# Altium PCB BMS2.PcbDoc
Units mm, origin at the board's own origin, x right, y up, seen from the top; angles counter-clockwise.
Board outline 110.8 x 102.8 mm, 2 copper layers (Top Layer, Bottom Layer); 70 components, 54 nets, 280 pads, 54 vias.
Unrouted connection lines stored in the file: 1.
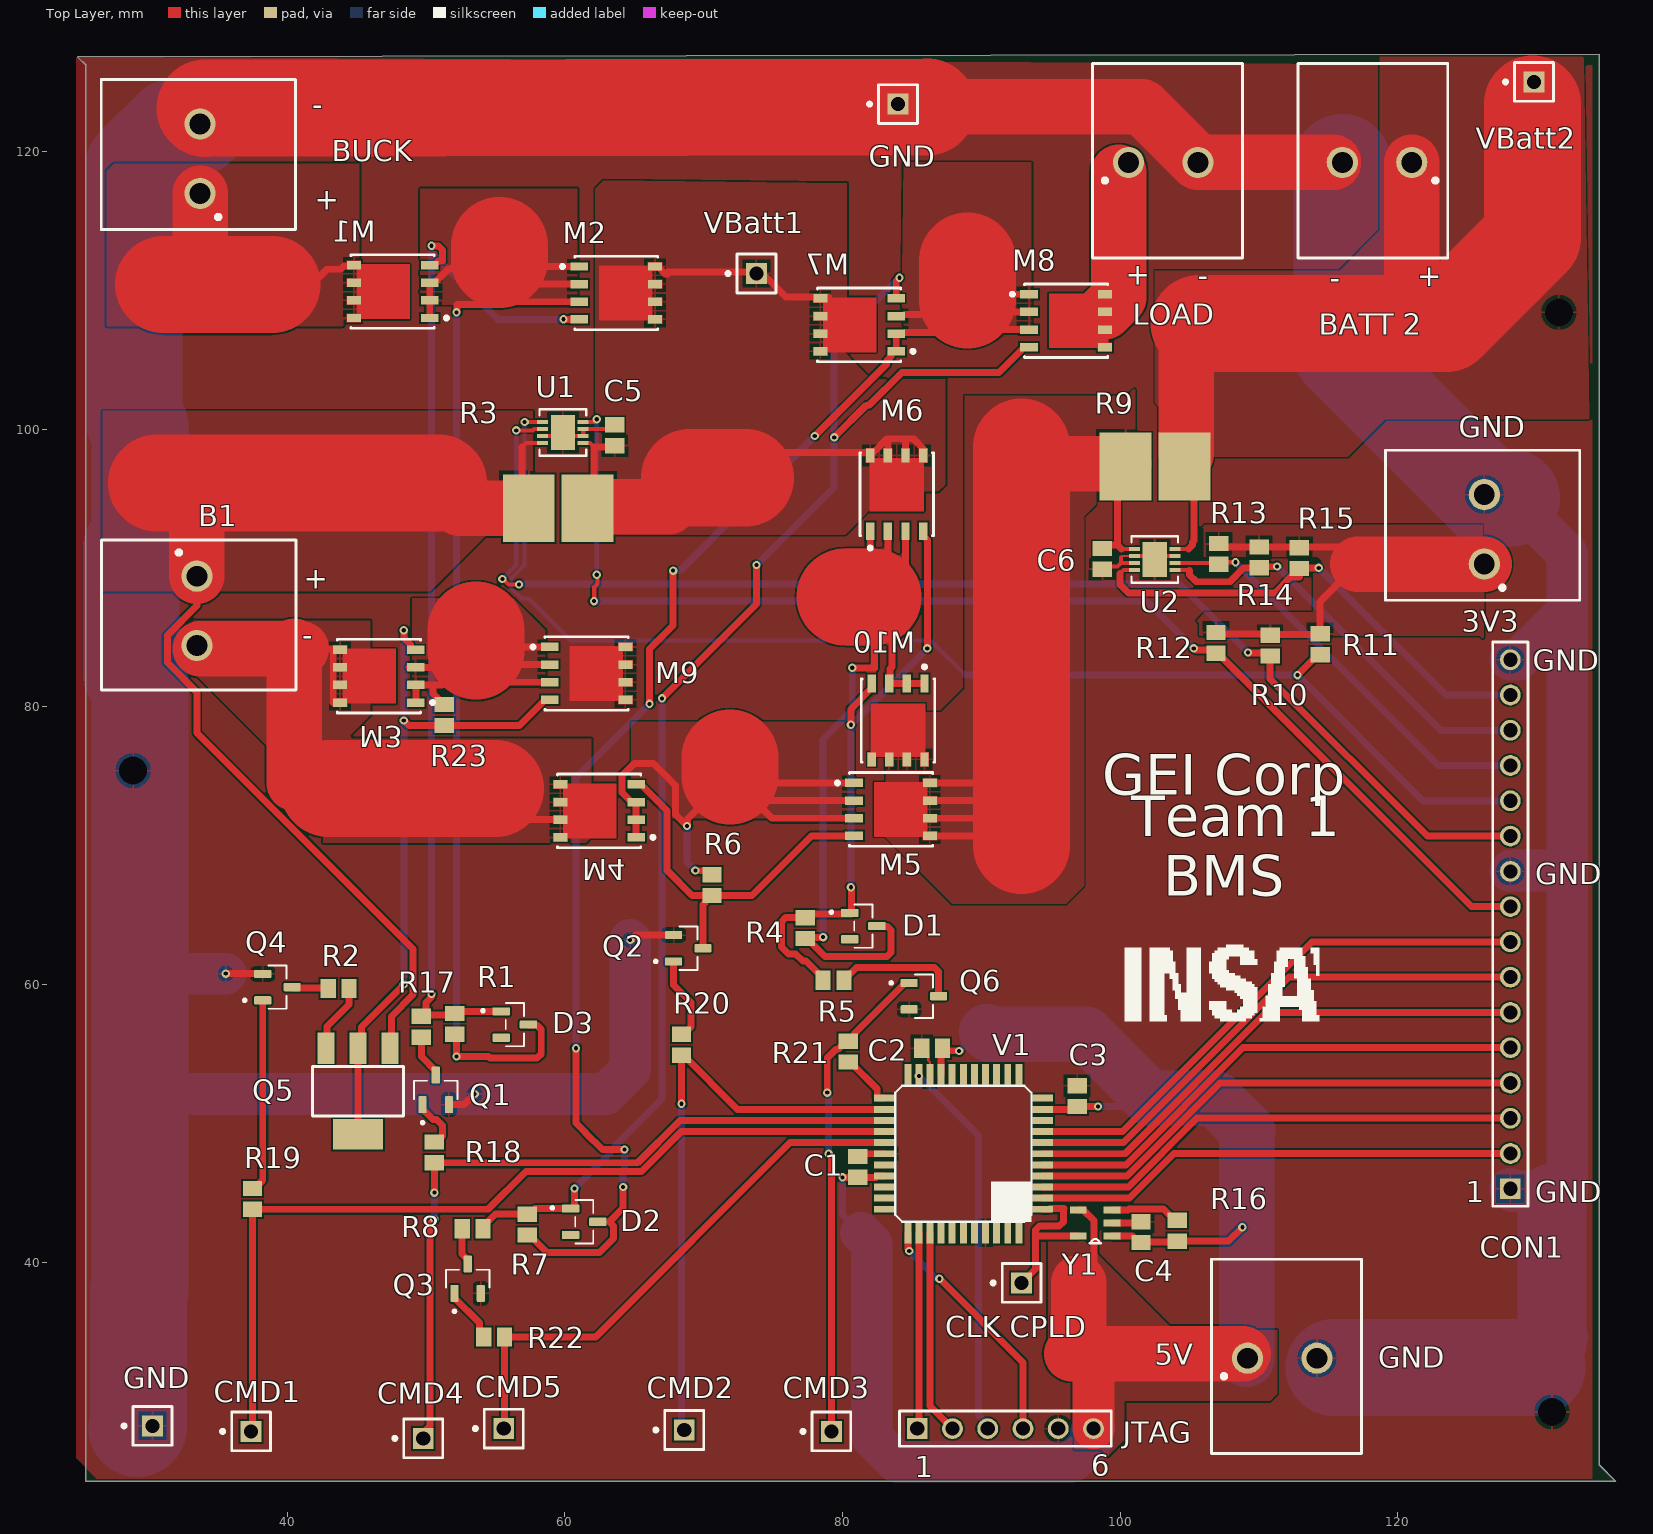
[diagram p0: Top Layer view]
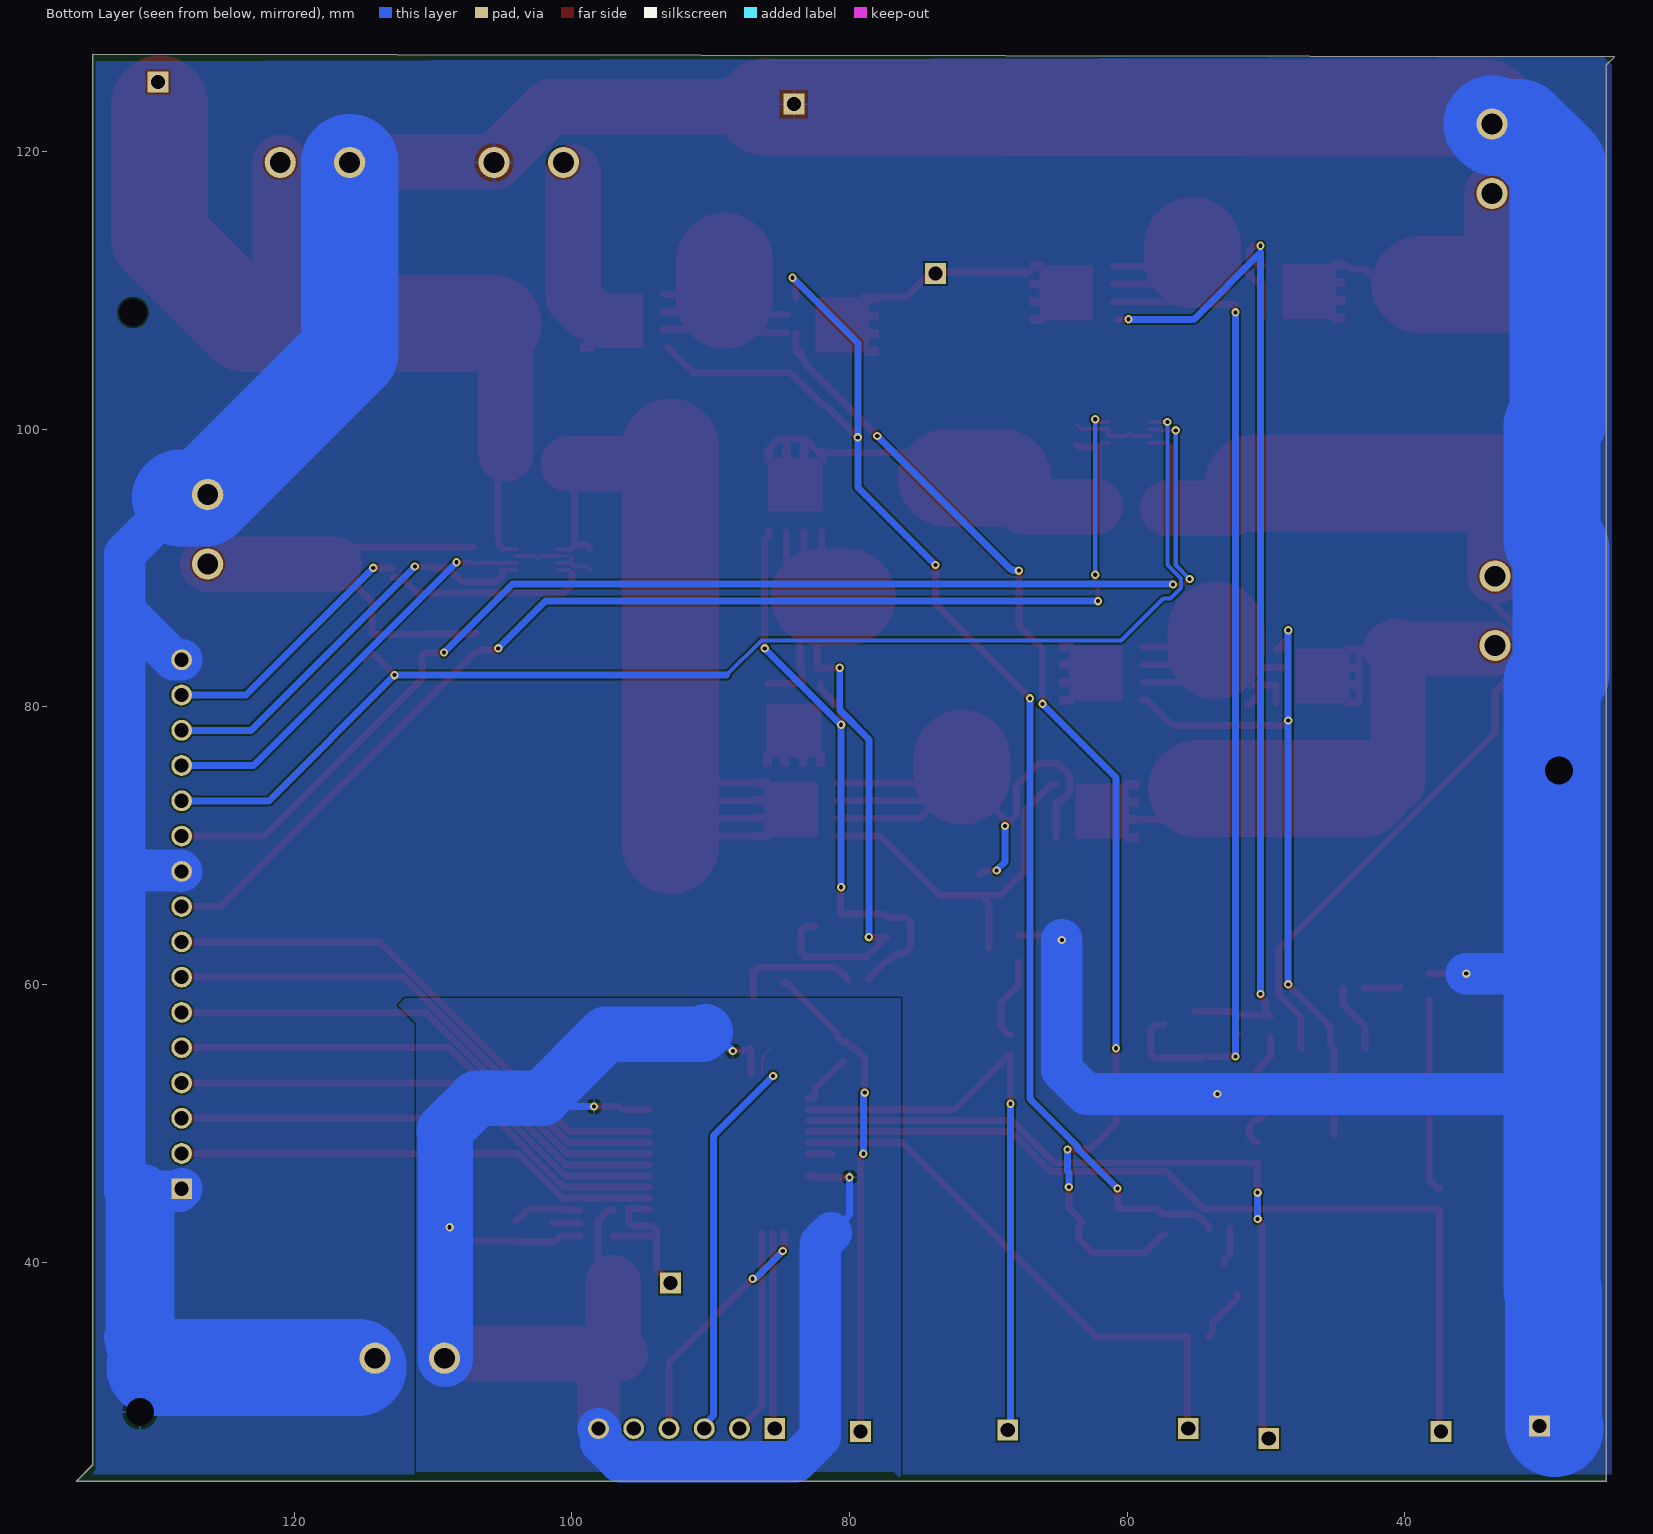
[diagram p1: Bottom Layer view, seen from below]

## Layer stack, top to bottom
Top Solder: solder mask 0.0102, Solder Resist, Dk 3.5
Top Layer: signal copper 0.0356
Dielectric 1: dielectric 0.32, FR-4, Dk 4.8
Bottom Layer: signal copper 0.0356
Bottom Solder: solder mask 0.0102, Solder Resist, Dk 3.5

## Board outline
24.9,126.8 25.5,126.2 25.5,24.2 135.7,24.2 134.5,25.4 134.5,127

## Design rules (kind name [scope] priority, off if disabled: settings)
Clearance [All] p1: gap=0.125 ignorepadtopadclearanceinfootprint=FALSE except(0: Arc-Hole Track-Hole SMDPad-Hole THPad-Hole Via-Hole Fill-Hole Poly-Hole Region-Hole Text-Hole)
DiffPairsRouting [All] p1: maxlimit=10 minlimit=0.125 mostfreqgap=0.15 toplayer_minwidth=0.381 toplayer_maxwidth=0.381 toplayer_prefwidth=0.381 bottomlayer_minwidth=0.381 bottomlayer_maxwidth=0.381 bottomlayer_prefwidth=0.381 maxuncoupledlength=12.7
FabricationTestPointUsage FabricationTestPointUsage_1 [All] p1: valid=0 allowmultiple=FALSE
FabricationTestpoint FabricationTestpoint_1 [All] p1: side=3 testpointundercomponent=TRUE minsize=1.016 maxsize=2.54 preferedsize=1.524 minholesize=0 maxholesize=1.016 preferedholesize=0.813 testpointgrid=0.025 allowsidetop=TRUE allowsidebottom=TRUE usegrid=TRUE gridtolerance=0
HoleSize [All] p1: absolutevalues=TRUE maxlimit=6 minlimit=0.2 maxpercent=80.000 minpercent=20.000
HoleSize FabricationTestpoint [All] p2 off: absolutevalues=TRUE maxlimit=2.54 minlimit=0.025 maxpercent=80.000 minpercent=20.000
HoleSize FabricationTestPointUsage [All] p3 off: absolutevalues=TRUE maxlimit=2.54 minlimit=0.025 maxpercent=80.000 minpercent=20.000
PlaneClearance [All] p1: clearance=0.5
PlaneConnect [All] p1: planeconnectstyle=Relief reliefexpansion=0.4 reliefentries=4 reliefconductorwidth=0.15 reliefairgap=0.15
PolygonConnect [All] p1: connectstyle=Relief reliefconductorwidth=0.15 reliefentries=4 polygonreliefangle="90 Angle" airgapwidth=0.254
RoutingCorners [All] p1: cornerstyle=45-Degree minsetback=1.25 maxsetback=1.25
RoutingVias [All] p1: holewidth=0.3 width=0.6 viastyle="Through Hole" minholewidth=0.2 minwidth=0.45 maxholewidth=0.45 maxwidth=0.75
SolderMaskExpansion [All] p1: expansion=0.075
Width [All] p1: maxlimit=10 minlimit=0.125 preferedwidth=0.15
23 further rules are at their usual default settings.

## Classes and differential pairs
component class "Switch and batteries": B1 "BATT 2" BUCK CMD1 CMD2 CMD3 CMD4 CMD5 D1 D2 D3 GND LOAD M1 M2 M3 M4 M5 M6 M7 M8 M9 M10 Q1 Q2 Q3 Q4 Q5 Q6 R1 R2 R3 R4 R5 R6 R7 R8 R9 R17 R18 R19 R20 R21 R22 R23 VBatt1 VBatt2 x
component class "Gauges and measure": C5 C6 R10 R11 R12 R13 R14 R15 U1 U2
component class Designator: 5V CON1 GND
component class CPLD: C1 C2 C3 C4 "CLK CPLD" JTAG R16 V1 Y1

## Components (designator, comment, footprint, x,y, rotation, side; value= is the part's Value field where it differs from the comment)
5V "Bornier_1" Block_2Position#1 111.8,33.2 r0 top (schematic designator CON2)
B1 "Bornier_1" Block_2Position#1 33.627,86.773 r270 top
"BATT 2" "Bornier_1" Block_2Position#2 118.373,119.327 r180 top (schematic designator B2)
BUCK "Bornier_1" Block_2Position#1 33.6,119.6 r90 top (schematic designator CON5)
C1 "Cap_0.1u" C0805 81.1,46.85 r270 top value=0.1uF
C2 "Cap_0.1u" C0805 86.45,55.4 r0 top value=0.1uF
C3 "Cap_0.1u" C0805 96.9,51.95 r270 top value=0.1uF
C4 "Cap_0.1u" C0805 101.5,42.15 r270 top value=0.1uF
C5 "Cap_1" C0805 63.6,99.55 r90 top value=1uF
C6 "Cap_1" C0805 98.7,90.65 r270 top value=1uF
"CLK CPLD" "Header_1" PIN1 92.9,38.5 r90 top (schematic designator "Test Point 4")
CMD1 "Header_1" PIN1 37.4,27.8 r90 top (schematic designator "Test Point 5")
CMD2 "Header_1" PIN1 68.6,27.9 r90 top (schematic designator "Test Point 7")
CMD3 "Header_1" PIN1 79.2,27.8 r90 top (schematic designator "Test Point 8")
CMD4 "Header_1" PIN1 49.8,27.3 r90 top (schematic designator "Test Point 6")
CMD5 "Header_1" PIN1 55.6,28 r90 top (schematic designator "Test Point 9")
CON1 "Header 16" HDR1X16 128.1,45.28 r90 top
D1 "D Zener" SOT95P230X110-3N_ZENER 81.5,64.2 r0 top
D2 "D Zener" SOT95P230X110-3N_ZENER 61.4,42.9 r0 top
D3 "D Zener" SOT95P230X110-3N_ZENER 56.4,57.1 r0 top
GND "Header_1" PIN1 84,123.4 r90 top (schematic designator "Test Point GND2")
GND "Header_1" PIN1 30.3,28.2 r90 top (schematic designator "Test Point GND1")
GND "Bornier_1" Block_2Position#1 126.1,92.9 r90 top (schematic designator CON3)
JTAG "Header 6" HDR1X6 85.38,28 r0 top (schematic designator CON4)
LOAD "Bornier_1" Block_2Position#1 103.227,119.327 r0 top (schematic designator CON6)
M1 "MOSFET-P" Vishay_S17-0173-SINGLE_MFG 47.6,109.9 r180 top
M2 "MOSFET-P" Vishay_S17-0173-SINGLE_MFG 63.7,109.8 r0 top
M3 "MOSFET-N" Vishay_S17-0173-SINGLE_MFG 46.6,82.2 r180 top
M4 "MOSFET-P" Vishay_S17-0173-SINGLE_MFG 62.47,72.495 r180 top
M5 "MOSFET-P" Vishay_S17-0173-SINGLE_MFG 83.5,72.6 r0 top
M6 "MOSFET-P" Vishay_S17-0173-SINGLE_MFG 83.9,95.3 r90 top
M7 "MOSFET-P" Vishay_S17-0173-SINGLE_MFG 81.2,107.5 r180 top
M8 "MOSFET-P" Vishay_S17-0173-SINGLE_MFG 96.1,107.8 r0 top
M9 "MOSFET-N" Vishay_S17-0173-SINGLE_MFG 61.57,82.395 r0 top
M10 "MOSFET-P" Vishay_S17-0173-SINGLE_MFG 84,79 r270 top
Q1 "NPN" SOT95P237X111-3N_NPN#1 50.7,52.4 r90 top
Q2 "NPN" SOT95P237X111-3N_NPN#2 68.9,62.6 r0 top
Q3 "NPN" SOT95P237X111-3N_NPN#1 53,38.8 r90 top
Q4 "NPN" SOT95P237X111-3N_NPN#2 39.3,59.8 r0 top
Q5 "PNP" SOT230P700X180-4N 45.1,52.3 r0 top
Q6 "NPN" SOT95P237X111-3N_NPN#1 85.86,59.15 r0 top
R1 "Res_100k" C0805 52.06,57.15 r270 top
R2 "Res_2k" C0805 43.7,59.7 r0 top
R3 "Res_5m" RES_WSHM2818_VIS-M 59.521,94.3 r0 top
R4 "Res_2k" C0805 77.3,64.05 r270 top
R5 "Res_100k" C0805 79.35,60.3 r180 top
R6 "Res_100k" C0805 70.6,67.15 r90 top
R7 "Res_100k" C0805 57.3,42.7 r270 top
R8 "Res_100k" C0805 53.35,42.4 r0 top
R9 "Res_5m" RES_WSHM2818_VIS-M 102.5,97.3 r180 top
R10 "Res_2k" C0805 110.8,84.4 r90 top
R11 "Res_2k" C0805 114.4,84.5 r90 top
R12 "Res_2k" C0805 106.9,84.6 r90 top
R13 "Res_2k" C0805 107.1,91 r90 top
R14 "Res_2k" C0805 110,90.75 r90 top
R15 "Res_2k" C0805 112.9,90.7 r90 top
R16 "Res_60k" C0805 104.1,42.25 r270 top
R17 "Res_100k" C0805 49.66,56.95 r90 top
R18 "Res_10k" C0805 50.6,47.9 r90 top
R19 "Res_10k" C0805 37.5,44.55 r90 top
R20 "Res_10k" C0805 68.4,55.65 r90 top
R21 "Res_10k" C0805 80.4,55.15 r90 top
R22 "Res_10k" C0805 54.9,34.6 r180 top
R23 "Res_10k" C0805 51.3,79.4 r90 top
U1 "LTC2944" DFN-8_DD_Gauges 59.861,99.75 r180 top
U2 "LTC2944" DFN-8_DD_Gauges 102.5,90.6 r0 top
V1 "XC9572XL-10VQG44C" VQFP-44_CPLD 88.7,47.8 r180 top
VBatt1 "Header_1" PIN1 73.8,111.2 r90 top (schematic designator Test_Point1)
VBatt2 "Header_1" PIN1 129.8,125 r90 top (schematic designator "Test Point 2")
Y1 "OSCILLATEUR_LTC6900CS5TRMPBF" SOT95P280X100-5N_OSC 98.2,42.8 r180 top

## Footprints (in the part's own frame and the unit in brackets; to place one, negate y for a bottom-side part, rotate by r counter-clockwise, add the part's x,y. Pads: shape width x height; smd on the part's side, far side on the other; paste and mask are expansions set on the pad)
Block_2Position#1 [mm]
  round 2.25 hole 1.5: 1(-2.627,-0.127) 2(2.373,-0.127)
  silkscreen extent -5.23,-7 5.57,7, body extent -5.23,-7 5.57,7, height 16
Block_2Position#2 [mm]
  round 2.25 hole 1.5: 1(-2.627,0.127) 2(2.373,0.127)
  silkscreen extent -5.23,-7 5.57,7, body extent -5.23,-7 5.57,7, height 16
C0805 [mm] "Chip Capacitor, Body 2.0x1.3mm, IPC High Density"
  rect 1.1x1.4 smd: 1(-0.75,0) 2(0.75,0)
  body extent -1.1,-0.72 1.1,0.72, height 1.4
DFN-8_DD_Gauges [mil]
  rect 31x12 smd: 1(-57.5,29.53) 2(-57.5,9.84) 3(-57.5,-9.84) 4(-57.5,-29.53) 5(57.5,-29.53) 6(57.5,-9.84) 7(57.5,9.84) 8(57.5,29.53)
  rect 69x98 smd paste-78.74: 9(0,0)
  silkscreen extent -66,-66 66,66, body extent -59,-59 59,59
HDR1X6 [mm] "Connector; Header; 6 Position"
  rect 1.5x1.5 hole 1.02: 1(0,0)
  round 1.5 hole 1.02: 2(2.54,0) 3(5.08,0) 4(7.62,0) 5(10.16,0) 6(12.7,0)
  silkscreen extent -1.27,-1.27 13.97,1.27
HDR1X16 [mm] "Connector; Header; 16 Position"
  rect 1.5x1.5 hole 1.02: 1(0,0)
  round 1.5 hole 1.02: 2(2.54,0) 3(5.08,0) 4(7.62,0) 5(10.16,0) 6(12.7,0) 7(15.24,0) 8(17.78,0) 9(20.32,0) 10(22.86,0) 11(25.4,0) 12(27.94,0) 13(30.48,0) 14(33.02,0) 15(35.56,0) 16(38.1,0)
  silkscreen extent -1.27,-1.27 39.37,1.27
PIN1 [mm] "Connector; Plug"
  rect 1.5x1.5 hole 1.02: 1(0,0)
  silkscreen extent -1.4,-1.4 1.4,2.17
RES_WSHM2818_VIS-M [mil]
  rect 147x192 smd paste+0 mask+0: 1(-83.5,0) 2(83.5,0)
  body extent 0,0 10,10, height 10
SOT95P230X110-3N_ZENER [mm]
  rrect25% 1.26x0.59 smd: 1(-0.98,0.95) 2(-0.98,-0.95) 3(0.98,0)
  silkscreen extent -2.4,-1.56 0.65,1.56, body extent -1.15,-1.45 1.15,1.45, height 1.1
SOT95P237X111-3N_NPN#1 [mm]
  rrect25% 1.23x0.6 smd: 1(-1.06,0.95) 2(-1.06,-0.95) 3(1.06,0)
  silkscreen extent -2.46,-1.56 0.65,1.56
SOT95P237X111-3N_NPN#2 [mm]
  rrect25% 1.23x0.6 smd: 1(-1.06,-0.95) 2(-1.06,0.95) 3(1.06,0)
  silkscreen extent -2.46,-1.56 0.65,1.56
SOT95P280X100-5N_OSC [mil]
  rect 48x20 smd: 1(-48,37) 2(-48,0) 3(-48,-37) 4(48,-37) 5(48,37)
  silkscreen extent -16,45 16,57
SOT230P700X180-4N [mil]
  rect 48x88 smd: 1(-91,122) 2(0,122) 3(91,122)
  rect 141.73x86.61 smd: 4(0,-122.01)
  silkscreen extent -129,-70 129,70
Vishay_S17-0173-SINGLE_MFG [mm]
  rect 1.27x0.61 smd paste+0 mask+0: 1(-2.67,1.905) 2(-2.67,0.635) 3(-2.67,-0.635) 4(-2.67,-1.905)
  rect 1.016x0.61 smd paste+0 mask+0: 5(2.794,1.905) 6(2.794,0.635) 7(2.794,-0.635) 8(2.794,-1.905)
  Top Layer region: -1.215,1.955 2.285,1.955 2.285,2.21 3.305,2.21 3.305,1.6 2.595,1.6 2.595,0.94 3.305,0.94 3.305,0.33 2.595,0.33 2.595,-0.33 3.305,-0.33 3.305,-0.94 2.595,-0.94 2.595,-1.6 3.305,-1.6 3.305,-2.21 2.285,-2.21 2.285,-1.955 -1.215,-1.955
  silkscreen extent -4,-2.65 3,2.65, body extent -3.07,-2.58 3.07,2.58, height 1.12
VQFP-44_CPLD [mm] "CPLD"
  rect 0.5x1.5 smd: 1(-4,5.7) 2(-3.2,5.7) 3(-2.4,5.7) 4(-1.6,5.7) 5(-0.8,5.7) 6(0,5.7) 7(0.8,5.7) 8(1.6,5.7) 9(2.4,5.7) 10(3.2,5.7) 11(4,5.7) 23(4,-5.7) 24(3.2,-5.7) 25(2.4,-5.7) 26(1.6,-5.7) 27(0.8,-5.7) 28(0,-5.7) 29(-0.8,-5.7) 30(-1.6,-5.7) 31(-2.4,-5.7) 32(-3.2,-5.7) 33(-4,-5.7)
  rect 1.5x0.5 smd: 12(5.7,4) 13(5.7,3.2) 14(5.7,2.4) 15(5.7,1.6) 16(5.7,0.8) 17(5.7,0) 18(5.7,-0.8) 19(5.7,-1.6) 20(5.7,-2.4) 21(5.7,-3.2) 22(5.7,-4) 34(-5.7,-4) 35(-5.7,-3.2) 36(-5.7,-2.4) 37(-5.7,-1.6) 38(-5.7,-0.8) 39(-5.7,0) 40(-5.7,0.8) 41(-5.7,1.6) 42(-5.7,2.4) 43(-5.7,3.2) 44(-5.7,4)
  silkscreen extent -4.9,-4.9 4.9,4.9

## Part data
5V B1 "BATT 2" BUCK GND LOAD: "Bornier à vis"
C1 C2 C3 C4 C5 C6: "Capacitor", LatestRevisionDate=17-Jul-2002, LatestRevisionNote="Re-released for DXP Platform.", PackageDescription="Radial Cap, Thru-Hole; 2 Leads; 0.3 in Pin Spacing", PackageReference=RAD-0.3, Published=8-Jun-2000, Publisher="Altium Limited"
"CLK CPLD" CMD1 CMD2 CMD3 CMD4 CMD5 GND GND VBatt1 VBatt2: "Header 1-pin"
CON1: "Header, 16-Pin", LatestRevisionDate=17-Jul-2002, LatestRevisionNote="Re-released for DXP Platform.", Publisher="Altium Limited"
D1 D2 D3: "Zener Diode", LatestRevisionDate=17-Jul-2002, LatestRevisionNote="Re-released for DXP Platform.", PackageDescription="Diode, Thru-Hole; 2 Leads; 0.7 in Pin Spacing", PackageReference=DIODE-0.7, Published=8-Jun-2000, Publisher="Altium Limited"
JTAG: "Header, 6-Pin", LatestRevisionDate=17-Jul-2002, LatestRevisionNote="Re-released for DXP Platform.", Publisher="Altium Limited"
M1 M2 M4 M5 M6 M7 M8 M10: "P-Channel MOSFET", LatestRevisionDate=17-Jul-2002, LatestRevisionNote="Re-released for DXP Platform.", PackageDescription="TO, Flat Index; 3 In-Line, Axial Leads; Body Dia. 4.6mm; Lead Dia. 0.5 mm (max)", PackageReference=E3, PackageVersion=1995/1996, Published=8-Jun-2000, Publisher="Altium Limited"
M3 M9: "N-Channel MOSFET", LatestRevisionDate=17-Jul-2002, LatestRevisionNote="Re-released for DXP Platform.", PackageDescription="TO, Flat Index; 3 In-Line, Axial Leads; Body Dia. 4.6mm; Lead Dia. 0.5 mm (max)", PackageReference=E3, PackageVersion=1995/1996, Published=8-Jun-2000, Publisher="Altium Limited"
Q1 Q2 Q3 Q4 Q6: "NPN Bipolar Transistor", Code_JEDEC=TO-226-AA, LatestRevisionDate=17-Jul-2002, LatestRevisionNote="Re-released for DXP Platform.", PackageDescription="TO, Flat Index; 3 In-Line, Axial Leads; Body Dia. 4.8mm; Leads 0.55 x 0.51 mm (max)", PackageReference=TO-226-AA, Published=8-Jun-2000, Publisher="Altium Limited"
Q5: "PNP Bipolar Transistor", LatestRevisionDate=29-May-2009, LatestRevisionNote="IPC-7351 Footprint Added.", PackageDescription="3-Pin SOT-23 Package 0.95 mm Pitch, 2.4 mm Lead Span", PackageReference=SOT-23B, PackageVersion=Aug-1999, Published=8-Jun-2000, Publisher="Altium Limited"
R1 R2 R3 R4 R5 R6 R7 R8 R9 R10 R11 R12 R13 R14 R15 R16 R17 R18 R19 R20 R21 R22 R23: "Resistor"
U1 U2: "Gas gauge"
V1: "IC CPLD 72MC 10NS 44VQFP", Package="VQFP-44 Xilinx", Availability=Warning, Check_prices=https://www.snapeda.com/parts/XC9572XL-10VQG44C/Xilinx%20Inc./view-part/51416/?ref=eda, MF="Xilinx Inc.", MP=XC9572XL-10VQG44C, Price=None, Purchase-URL=https://pricing.snapeda.com/search/part/XC9572XL-10VQG44C/?ref=eda, SnapEDA_Link=https://www.snapeda.com/parts/XC9572XL-10VQG44C/Xilinx%20Inc./view-part/51416/?ref=snap
Y1: "Low Power, 1kHz to 20MHz Resistor Set SOT-23 Oscillator", Package=None, Availability=Unavailable, MP=LTC6900CS5TRMPBF, Price=None

## Free pads (board coordinates)
  round 1.524 hole 2: 3(28.9,75.4) 4(131.1,29.2) 6(131.6,108.4)

## Via types
v1: diameter 0.6, hole 0.3, Top Layer to Bottom Layer, 54 vias

## Nets (pads, with @x,y where several pads share a name; then routed paths per layer and width w, separated by ;. In a path a pad name is that pad's centre, name@x,y a point inside that pad or via, vN(x,y) a via of type N, cw(c..) or ccw(c..) an arc to the next point about the centre after c; other vN are vias at no path point)
+3V3: GND.1@126.227,90.273 R10.2 R11.2 R12.2 R13.2 R14.2 R15.2 | length 33.4
  Top Layer w0.5: R12.2 107,85.25 110.7,85.25 R10.2 110.85,85.2 114.35,85.2 R11.2 114.4,87.558 117.115,90.273 115.888,91.5 112.9,91.5 R14.2 R13.2@107.1,91.5
  Top Layer w4: 117.115,90.273 GND.1@126.227,90.273
+5: 5V.1 C1.2 C2.2 C3.2 C4.2 JTAG.6 R16.2 V1.15 V1.26 V1.35 Y1.1 Y1.4 | length 133.2
  Top Layer w0.5: v1(80,46.1) C1.2 82.4,46.1 82.5,46.2 V1.15 ; V1.26 C2.2@87.1,55.3 ; C2.2 C2.2@87.1,55.3 ; v1(88.4,55.2) 88.381,55.219 87.181,55.219 C2.2@87.1,55.3 ; V1.35 96.35,51 C3.2@96.6,51.25 ; C3.2 v1(98.4,51.2) ; 96.981,39.819 97,39.8 ; Y1.4 97.336,43.74 98.1,42.976 98.1,39.6 97,38.5 ; 97,33.9 96.5,33.4 98.08,31.82 ; Y1.1 100.89,41.86 101.35,41.4 C4.2 101.55,41.45 104.05,41.45 R16.2 107.8,41.5 v1(108.8,42.5) ; 5V.1@108.846,33.4 5V.1
  Top Layer w3: JTAG.6 98.08,31.82
  Top Layer w4: 96.5,33.4 5V.1@108.846,33.4 ; 97,33.9 97,38.5
  Bottom Layer w0.5: v1(80,46.1) 80,43.4 81.3,42.1 ; v1(88.4,55.2) 89.8,56.6 90.4,56.6 ; v1(98.4,51.2) 101.543,51.2 102.143,51.8
  Bottom Layer w3: 81.3,42.1 82.1,41.3 82.1,27.382 83.857,25.625 96.524,25.625 97.915,27.016 97.915,27.835 JTAG.6
  Bottom Layer w4: 90.4,56.6 90.6,56.4 97.543,56.4 102.143,51.8 106.83,51.8 109.173,49.457 ; 5V.1@109.1,33.016 109.1,49.4
DoubleNMOS: M3.1 M3.2 M3.3 M9.1 M9.2 M9.3 R23.2 | length 29.7
  Top Layer w0.5: M3.3@48.77,82.835 52.435,82.835 ; M3.1 M3.2 50.5,81.565 ; R23.2 51.15,80.15 50.85,80.45 50.85,80.6 50.5,80.95 50.5,81.565 ; 53.495,84.105 53.6,84 ; M9.3 55.84,81.76 54.57,83.03 ; M9.2 54.57,83.03 ; M9.1 53.9,84.3 53.6,84 ; 50.5,81.565 51.165,81.565 52.435,82.835 ; 52.435,82.835 53.6,84 ; 53.6,84 54.57,83.03
  Top Layer w7: 53.6,84 53.6,85.5
GateM3: M3.4 M9.4 Q5.2 Q5.4 R23.1 | length 51
  Top Layer w0.5: Q5.4 Q5.2 45.343,55.642 45.343,56.943 v1(48.4,60) ; v1(48.4,79) 48.427,79 48.777,78.65 R23.1 56.73,78.65 58.57,80.49 M9.4 ; v1(48.4,85.5) 48.419,85.481 48.419,84.956 48.885,84.49 48.885,84.16 48.94,84.105 M3.4
  Bottom Layer w0.5: v1(48.4,60) v1(48.4,79) v1(48.4,85.5)
GND: 5V.2 "BATT 2.2" BUCK.2 C1.1 C2.1 C3.1 C4.1 C5.2 C6.2 CON1.1 CON1.10 CON1.16 GND.1@30.3,28.2 GND.1@84,123.4 GND.2 JTAG.5 LOAD.2 M9.5 M9.6 M9.7 M9.8 pad.3 pad.4 Q1.2 Q2.2 Q3.2 Q4.2 Q6.2 U1.2 U1.3 U1.7 U1.9 U2.2 U2.3 U2.7 U2.9 V1.4 V1.17 V1.25 Y1.2 | length 380.9
  Top Layer w0.15: C1.1 C1.1@81.3,47.8 ; C2.1 86.175,54.925 86.175,54.525 86.3,54.4 V1.25 ; 100.05,90.75 100.15,90.85 U2.2 ; U2.9@102.25,90.85 U2.9 U2.9@102.75,90.85
  Top Layer w0.3: U1.7 59.611,99.5 U1.9 60.11,99.5 U1.2 U1.3 63.3,100 C5.2 ; C6.2 98.9,90.1 99.8,90.1 100.05,90.35 ; 100.05,90.75 100.05,90.35 ; U2.3 100.05,90.35 ; U2.2 U2.9@102.25,90.85 ; C4.1@101.4,42.8 C4.1 ; U2.9@102.75,90.85 U2.7
  Top Layer w0.5: v1(35.58,60.774) 38.214,60.774 Q4.2 ; Q1.2 52.74,51.34 v1(53.5,52.1) v1@53.5,52 ; v1(64.7,63.2) v1@64.727,63.2 ; v1@64.8,63.2 v1@64.727,63.2 ; Q2.2 65.077,63.55 v1@64.727,63.2 ; C1.1@81.3,47.8 V1.17 ; Y1.2 C4.1@101.4,42.8
  Top Layer w4: 86.1,123.2 101.6,123.2 LOAD.2 115.375,119.2
  Top Layer w7: 34.1,123.1 86.1,123.2
  Bottom Layer w3: 29.4,60.774 v1(35.58,60.774) ; 32.3,52.1 v1(53.5,52.1) 62.943,52.1 64.7,53.857 v1(64.7,63.2) ; 5V.2 5V.2@114.2,33.1 ; CON1.1 128.28,45.1 132.2,45.1 132.2,68.2 ; CON1.10 128.16,68.2 132.2,68.2 ; CON1.16 128.68,83.38 132.2,86.9 ; 128.195,95.023 132.2,91.018 132.2,86.9 ; 130,32.4 132.2,34.6 ; 132.2,68.2 132.2,86.9
  Bottom Layer w5: 131.1,34.1 131.1,44.6
  Bottom Layer w7: 29.2,28 29.3,28.1 29.3,37.9 29.4,38 29.4,60.774 29.4,81.782 28.75,82.432 28.75,91.368 29.4,92.018 29.4,100.218 28.977,100.641 28.977,118.941 31.759,121.723 33.477,121.723 BUCK.2 ; 115.4,32.4 130,32.4 ; 116,119.2 116,105.5 GND.2 126.477,95.023 128.195,95.023
NetB1_1: B1.1 Q5.3 R3.1 U1.8 | length 81.1
  Top Layer w0.3: R3.1@56.9,94.8 R3.1 ; 56.9,98.7 57.2,99 U1.8
  Top Layer w0.5: B1.1 33.5,87.279 31.365,85.144 31.365,83.176 33.5,81.041 33.5,78.12 49.075,62.545 49.075,59.275 47.5,57.7 47.5,55.487 Q5.3 ; 50.9,96.1 52.7,94.3 ; R3.1@56.9,94.8 56.9,98.7 ; R3.1@57,93.9 R3.1
  Top Layer w4: B1.1 33.5,93.2 ; 52.4,94.3 52.7,94.3 R3.1@57.1,94.3
  Top Layer w7: 30.6,96.1 50.9,96.1
NetB2_1: "BATT 2.1" pad.6 R9.1 U2.8 VBatt2.1 | length 67.6
  Top Layer w0.3: U2.8 104.907,91.35
  Top Layer w0.5: R9.1 105.3,96.621 105.3,91.954 105.2,91.854 105.2,91.643 104.907,91.35 ; 105.7,107.6 107.258,106.042 ; 113.3,107.6 114.473,108.773 ; 121,110.1 123.5,107.6
  Top Layer w4: R9.1@104.758,98.2 104.758,105.842 ; 121,110.1 121,119.2
  Top Layer w7: 105.7,107.6 113.3,107.6 123.5,107.6 129.7,113.8 129.7,123.4
NetC5_1: C5.1 M2.5 M2.6 M2.7 M2.8 M6.5 M6.6 M6.7 M6.8 M7.5 M7.6 M7.7 M7.8 R3.2 U1.1 VBatt1.1 | length 54.2
  Top Layer w0.3: U1.1 61.8,99 62.1,98.7 ; R3.2 R3.2@62.1,94.758
  Top Layer w0.5: R3.2 R3.2@62.224,93.718 ; R3.2@62.1,94.758 62.1,98.7 63.5,98.7 C5.1 ; M2.8 M2.8@66.697,107.895 ; M2.7 M2.7@66.697,109.165 ; M2.6 M2.6@66.697,110.435 ; M2.5 66.697,111.705 67.254,111.148 67.41,111.148 67.41,111.3 74.129,111.3 75.924,109.505 79.006,109.505 79.006,108.235 M7.7@78.803,108.235 ; 66.812,94.3 66.912,94.4 69,96.488 ; 71.388,96.488 73.4,98.5 ; 74.2,98.3 81.94,98.3 M6.5@81.995,98.245 ; M6.5 M6.5@81.995,98.245 ; M6.6 83.265,99.236 83.201,99.3 ; M6.7 84.535,99.165 84.4,99.3 ; M6.8 85.795,98.104 85.795,98.605 85.1,99.3 84.4,99.3 ; M6.5@81.995,98.245 81.995,98.297 82.05,98.352 82.253,98.352 83.201,99.3 ; 83.201,99.3 84.4,99.3
  Top Layer w4: R3.2@62.3,94.4 66.912,94.4 67.47,94.4
  Top Layer w7: 69,96.488 71.388,96.488 73,96.488
NetC6_1: C6.1 M5.5 M5.6 M5.7 M5.8 M10.5 M10.6 M10.7 M10.8 R9.2 U2.1 | length 76
  Top Layer w0.3: 100.093,91.35 U2.1
  Top Layer w0.5: M5.8 92.205,70.695 ; M5.7 90.935,71.965 92.205,70.695 ; M5.6 91.735,73.235 92.9,74.4 ; M5.5 92.795,74.505 ; 90.206,77.306 92.9,80 ; 92.9,70 92.205,70.695 ; 92.9,98.7 94.3,97.3 ; C6.1 98.943,91.643 99.8,91.643 ; 100.093,91.35 99.8,91.643 ; R9.2 99.8,96.721 99.8,91.643
  Top Layer w4: 94.1,97.5 R9.2@100.246,97.5
  Top Layer w7: 92.9,70 92.9,74.4 92.9,77.306 92.9,80 92.9,98.7
NetCON1_2: CON1.2 V1.43 | length 35.4
  Top Layer w0.5: V1.43 100.67,44.6 103.89,47.82 CON1.2 CON1.2@128.1,47.5
NetCON1_3: CON1.3 V1.42 | length 35.8
  Top Layer w0.5: V1.42 100.586,45.4 105.546,50.36 CON1.3
NetCON1_4: CON1.4 V1.41 | length 37
  Top Layer w0.5: V1.41 100.502,46.2 107.202,52.9 CON1.4 CON1.4@127.7,52.5
NetCON1_5: CON1.5 V1.40 | length 37.2
  Top Layer w0.5: V1.40 100.418,47 108.858,55.44 CON1.5
NetCON1_6: CON1.6 V1.39 | length 37.9
  Top Layer w0.5: V1.39 100.334,47.8 110.514,57.98 CON1.6
NetCON1_7: CON1.7 V1.38 | length 38.6
  Top Layer w0.5: V1.38 100.25,48.6 112.17,60.52 CON1.7
NetCON1_8: CON1.8 V1.37 | length 39.4
  Top Layer w0.5: V1.37 100.166,49.4 113.826,63.06 CON1.8
NetCON1_9: CON1.9 R12.1 U1.4 | length 89.4
  Top Layer w0.3: U1.4 62.09,100.5 62.29,100.7 v1(62.3,100.7) ; v1@62.095,87.6 v1(62.1,87.6) 62.123,87.623 62.123,88.623 62.357,88.857 62.357,89.443 v1(62.3,89.5)
  Top Layer w0.5: v1(105.3,84.2) 105.327,84.2 105.45,84.077 106.673,84.077 R12.1 107.05,83.85 125.3,65.6 CON1.9
  Bottom Layer w0.3: v1(62.3,89.5) v1(62.3,100.7)
  Bottom Layer w0.5: v1(62.1,87.6) 101.9,87.6 v1(105.3,84.2)
NetCON1_11: CON1.11 R10.1 U1.6 | length 94.3
  Top Layer w0.3: v1(55.5,89.2) 55.55,89.2 55.95,88.8 v1(56.7,88.8) ; v1(56.5,99.9) 57.7,99.9 57.8,100 U1.6
  Top Layer w0.5: v1(109.2,83.9) 109.219,83.881 110.569,83.881 R10.1 110.8,82 122.12,70.68 CON1.11
  Bottom Layer w0.3: v1(55.5,89.2) 56.5,90.2 v1(56.5,99.9) ; v1(56.7,88.8) v1@56.757,88.857
  Bottom Layer w0.5: v1@56.757,88.857 56.79,88.825 104.275,88.825 v1(109.2,83.9)
NetCON1_12: CON1.12 R11.1 U1.5 | length 94.9
  Top Layer w0.3: v1(57.1,100.5) U1.5 ; R11.1@114.25,83.75 R11.1 114.55,83.75 R11.1@114.95,83.35
  Top Layer w0.5: v1(112.773,82.273) R11.1@114.25,83.75
  Bottom Layer w0.3: v1(57.1,100.5) 57.1,90.199 56.125,89.224 56.125,88.562 56.887,87.8 57.4,87.8 60.425,84.775 86.343,84.775 88.845,82.273
  Bottom Layer w0.5: 88.845,82.273 v1(112.773,82.273) 121.825,73.22 CON1.12
NetCON1_13: CON1.13 R13.1 U2.6 | length 30.4
  Top Layer w0.15: R13.1@107,90.35 R13.1
  Top Layer w0.3: U2.6 R13.1@107,90.35 ; R13.1 107.25,90.4 v1(108.3,90.4)
  Bottom Layer w0.5: v1(108.3,90.4) 122.94,75.76 CON1.13 CON1.13@128.04,75.7
NetCON1_14: CON1.14 R14.1 U2.5 | length 30
  Top Layer w0.15: 104.95,89.85 105,89.8
  Top Layer w0.3: U2.5 104.95,89.85
  Top Layer w0.5: 105,89.8 105,89.5 105.5,89 107.9,89 108.88,89.98 108.88,90 R14.1 110.081,90.081 111.281,90.081 v1(111.3,90.1)
  Bottom Layer w0.5: v1(111.3,90.1) 123.1,78.3 CON1.14
NetCON1_15: CON1.15 R15.1 U2.4 | length 34.6
  Top Layer w0.3: 100,89.6 100.25,89.85 U2.4
  Top Layer w0.5: 100,89.6 100,88.8 100.6,88.2 111.15,88.2 112.275,89.325 112.9,89.325 ; R15.1 112.931,89.981 114.281,89.981 v1(114.3,90)
  Bottom Layer w0.5: v1(114.3,90) 123.46,80.84 CON1.15
NetCON4_1: JTAG.1 V1.10 | length 14.1
  Top Layer w0.5: JTAG.1 85.5,28.12 V1.10
NetCON4_2: JTAG.2 V1.9 | length 14.8
  Top Layer w0.5: V1.9 86.3,29.62 JTAG.2
NetCON4_3: JTAG.3 V1.24 | length 27.8
  Top Layer w0.5: v1(85.5,53.4) V1.24 ; JTAG.3 JTAG.3@90.46,28.271
  Bottom Layer w0.5: v1(85.5,53.4) 89.8,49.1 89.8,28.931 90.46,28.271 JTAG.3
NetCON4_4: JTAG.4 V1.11 | length 17.6
  Top Layer w0.5: V1.11 84.7,40.927 84.8,40.827 v1(84.8,40.8) ; v1(86.975,38.8) 93,32.775 JTAG.4
  Bottom Layer w0.5: v1(84.8,40.8) 86.781,38.819 86.956,38.819 v1(86.975,38.8)
NetCON5_1: BUCK.1 M1.5 M1.6 M1.7 M1.8 | length 23.5
  Top Layer w0.5: 31.093,110.4 30.8,110.693 30.8,112.507 31.093,112.8 33.1,112.8 33.727,113.427 ; 38.9,110.4 39.065,110.235 41.586,110.235 42.856,111.505 43.836,111.505 44.081,111.75 44.751,111.75 M1.8
  Top Layer w4: 33.727,113.427 BUCK.1
  Top Layer w7: 31.093,110.4 38.9,110.4
NetCON6_1: LOAD.1 M8.5 M8.6 M8.7 M8.8 | length 16.7
  Top Layer w0.5: M8.8 M8.7 M8.6 M8.5 ; 98.894,117.494 99.9,118.5 LOAD.1
  Top Layer w4: M8.6 99.9,109.441 LOAD.1@99.9,118.5
NetD1_1: D1.1 M6.4 M10.4 R4.1 R5.2 | length 44.8
  Top Layer w0.5: R5.2 78.6,60.45 77.378,61.672 77.147,61.672 76.62,62.2 76.1,62.2 75.6,62.7 75.6,64.507 75.893,64.8 R4.1 77.555,65.055 D1.1@80.655,65.055 ; v1(80.6,67) 80.6,66.973 80.655,66.918 80.655,65.109 D1.1@80.619,65.145 ; v1(80.6,78.695) 80.6,79.845 82.095,81.34 M10.4 ; M6.4 85.805,92.3 86.105,92 v1(86.105,84.2)
  Bottom Layer w0.5: v1(80.6,67) v1(80.6,78.695) v1(86.105,84.2)
NetD1_3: D1.3 M6.1 M6.2 M6.3 M10.1 M10.2 M10.3 R4.2 | length 66.4
  Top Layer w0.5: v1(78.6,63.4) 78.581,63.381 77.381,63.381 R4.2 77.45,63.3 78.75,62 83.207,62 83.5,62.293 83.5,63.907 83.252,64.155 82.525,64.155 D1.3 ; 79.1,87.8 81.995,90.695 M6.1 ; v1(80.7,82.8) 80.715,82.785 82.28,82.785 82.295,82.77 ; 82.295,82.87 82.295,86.195 83.565,87.465 ; M6.2 83.265,88.435 83.9,87.8 ; M6.3 84.535,88.435 83.9,87.8 ; 84.835,86.865 83.9,87.8 ; M10.1 M10.2 M10.3 83.42,81.725 83.42,82.725 83.565,82.87 83.565,87.465 ; 83.565,87.465 83.9,87.8
  Top Layer w7: 80.2,87.9 82.2,87.9
  Bottom Layer w0.5: v1(78.6,63.4) 78.6,77.65 80.7,79.75 v1(80.7,82.8)
NetD2_1: D2.1 M7.4 M8.4 R7.1 R8.2 | length 102.3
  Top Layer w0.15: 83.87,110.67 v1(84.1,110.9) ; 84.2,104 84.267,104.067 ; M8.4@93.1,105.895 M8.4
  Top Layer w0.5: R8.2 54.1,42.55 55,43.45 R7.1 57.45,43.45 57.85,43.85 D2.1 60.636,43.85 60.681,43.895 60.681,45.281 v1(60.7,45.3) ; v1(67,80.6) 73.8,87.4 v1(73.8,90.2) ; v1(79.4,99.4) 81.71,101.71 81.91,101.71 84.2,104 ; M7.4 83.87,110.67 ; 84.267,104.067 91.272,104.067 M8.4@93.1,105.895
  Bottom Layer w0.5: v1(60.7,45.3) 63.575,48.175 63.575,48.33 67,51.755 v1(67,80.6) ; v1(73.8,90.2) 79.4,95.8 v1(79.4,99.4) 79.4,106.2 v1(84.1,110.9)
NetD2_3: D2.3 M7.1 M7.2 M7.3 M8.1 M8.2 M8.3 R7.2 | length 110.9
  Top Layer w0.5: R7.2 57.45,41.95 58.7,40.7 62.5,40.7 63.5,41.7 63.5,42.607 63.207,42.9 64.2,43.893 v1(64.2,45.4) ; v1(60.8,55.4) 60.8,50.027 61.5,49.327 61.5,49.3 62.7,48.1 v1(64.3,48.1) ; v1(66.1,80.2) 66.1,84.15 67.8,85.85 v1(67.8,89.8) ; v1(78,99.5) 83.187,104.687 83.187,104.912 83.485,105.21 83.485,105.54 83.54,105.595 M7.1 M7.2 M7.2@83.854,106.881 ; M7.2@84.47,106.965 86.665,106.965 87.935,108.235 ; M7.3@84.47,108.235 87.935,108.235 ; 88.795,109.505 89,109.3 ; M8.3 91.135,107.165 89.865,108.435 ; M8.2 89.865,108.435 ; M8.1 89.405,109.705 89,109.3 ; 87.935,108.235 89,109.3 ; 89,109.3 89.865,108.435
  Top Layer w7: 89,109.3 89,112.1
  Bottom Layer w0.5: v1(60.8,55.4) 60.8,74.9 v1(66.1,80.2) ; v1(64.2,45.4) 64.2,46.45 64.3,46.55 v1(64.3,48.1) ; v1(67.8,89.8) 67.819,89.819 68.219,89.819 68.3,89.9 68.4,89.9 v1(78,99.5)
NetD3_1: D3.1 M1.4 M2.4 R1.1 R17.2 | length 75.6
  Top Layer w0.5: R17.2 49.81,57.7 50,57.89 50,58.7 50.381,59.081 50.381,59.281 v1(50.4,59.3) ; R17.2@50.11,57.8 51.96,57.8 R1.1 52.215,58.055 D3.1@55.155,58.055 ; M1.4 50.6,111.805 50.893,112.098 51.2,112.098 51.2,112.888 50.907,113.181 50.419,113.181 v1(50.4,113.2) ; v1(59.9,107.9) 59.903,107.897 60.698,107.897 M2.4@60.7,107.895
  Bottom Layer w0.5: v1(50.4,59.3) 50.4,112.7 55.2,107.9 v1(59.9,107.9)
NetD3_3: D3.3 M1.1 M1.2 M1.3 M2.1 M2.2 M2.3 R1.2 | length 96.8
  Top Layer w0.15: M1.3 M1.3@50.6,110.535 ; 51.57,111.505 51.78,111.505
  Top Layer w0.5: M1.1 M1.2 M1.3 ; M1.3@50.6,110.535 51.57,111.505 ; 51.78,111.505 52.075,111.8 55.1,111.8 ; R1.2 52.181,56.279 52.181,54.819 v1(52.2,54.8) 54.5,54.8 54.6,54.7 58.007,54.7 58.3,54.993 58.3,56.762 58.007,57.055 57.425,57.055 D3.3 ; v1(52.2,108.4) 52.219,108.419 52.219,108.932 52.253,108.965 54.935,108.965 55.135,109.165 M2.3 ; 54.435,110.235 55.1,110.9 ; M2.2 55.565,110.435 55.1,110.9 ; M2.1 55.345,111.705 55.1,111.95 55.1,111.8 ; 55.1,110.9 55.1,111.8
  Top Layer w7: 55.3,112.2 55.3,113.2
  Bottom Layer w0.5: v1(52.2,54.8) v1(52.2,108.4)
NetM4_1: M4.1 M4.2 M4.3 M5.1 M5.2 M5.3 R6.2 | length 49.9
  Top Layer w0.5: M4.1 M4.2 M4.3 64.81,73.13 64.13,73.81 64.13,75.03 65,75.9 66.4,75.9 67.97,74.33 67.97,72.23 v1(68.8,71.4) 68.819,71.419 68.819,71.919 71.9,75 72.395,74.505 ; v1(69.4,68.2) 69.419,68.181 70.319,68.181 R6.2 ; M5.3 74.935,71.965 73.665,73.235 ; M5.2 73.665,73.235 ; M5.1 72.395,74.505 ; 72.395,74.505 73.665,73.235
  Top Layer w7: 71.9,75 71.9,76.3
  Bottom Layer w0.5: v1(68.8,71.4) 68.8,68.827 69.4,68.227 v1(69.4,68.2)
NetM4_4: M4.4 M5.4 Q2.3 R6.1 | length 27.3
  Top Layer w0.5: M4.4 65.47,74.4 67.345,72.525 67.345,68.22 69.165,66.4 R6.1@70.45,66.4 ; Q2.3 69.96,65.76 70.15,65.95 70.15,66.1 R6.1@70.45,66.4 ; M5.4 77.772,70.695 73.477,66.4 R6.1 R6.1@70.45,66.4
NetQ1_1: Q1.1 R18.2 | length 3.8
  Top Layer w0.5: Q1.1 49.75,51.025 50.507,50.268 50.75,50.268 51.184,49.834 51.184,49.084 50.75,48.65 R18.2
NetQ1_3: Q1.3 R17.1 | length 3.2
  Top Layer w0.5: R17.1 49.66,54.815 50.7,53.775 Q1.3
NetQ2_1: Q2.1 R20.2 | length 6.1
  Top Layer w0.5: Q2.1 67.84,59.958 69.09,58.708 69.09,56.94 68.55,56.4 R20.2
NetQ3_1: Q3.1 R22.2 | length 4
  Top Layer w0.5: Q3.1 52.05,37.425 53.85,35.625 53.85,34.9 R22.2
NetQ3_3: Q3.3 R8.1 | length 2.7
  Top Layer w0.5: R8.1 52.6,40.575 53,40.175 Q3.3
NetQ4_1: Q4.1 R19.2 | length 13.9
  Top Layer w0.5: R19.2 37.65,45.3 38.24,45.89 Q4.1
NetQ4_3: Q4.3 R2.1 | length 2.6
  Top Layer w0.5: Q4.3 40.41,59.75 42.9,59.75 R2.1
NetQ5_1: Q5.1 R2.2 | length 5
  Top Layer w0.5: Q5.1 42.874,55.484 42.874,56.974 44.443,58.543 44.443,59.693 R2.2
NetQ6_1: CMD3.1 Q6.1 R21.2 | length 35.3
  Top Layer w0.5: v1(78.9,52.2) 78.9,54.68 79.545,55.325 79.675,55.325 80.25,55.9 R21.2 80.55,55.9 80.85,56.2 80.85,56.465 84.485,60.1 Q6.1 ; v1(79,47.8) 79,47.773 79.2,47.573 CMD3.1
  Bottom Layer w0.5: v1(78.9,52.2) 78.9,52.173 79,52.073 v1(79,47.8)
NetQ6_3: Q6.3 R5.1 | length 9.2
  Top Layer w0.5: R5.1 80.1,60.45 80.4,60.75 80.55,60.75 81,61.2 86.627,61.2 86.92,60.907 Q6.3
NetR16_1: R16.1 Y1.3 | length 5.1
  Top Layer w0.5: Y1.3 99.423,43.744 100.563,43.744 100.645,43.825 103.125,43.825 103.95,43 R16.1
NetR18_1: CMD4.1 R18.1 V1.20 | length 53.4
  Top Layer w0.5: CMD4.1@49.8,27.7 50.3,28.2 50.3,42.773 50.6,43.073 v1(50.6,43.1) ; v1(50.6,45) R18.1 65.25,47.15 68.3,50.2 V1.20
  Bottom Layer w0.5: v1(50.6,43.1) v1(50.6,45)
NetR19_1: CMD1.1 R19.1 V1.19 | length 63.9
  Top Layer w0.5: CMD1.1 37.5,27.9 R19.1 54.466,43.8 57.191,46.525 65.509,46.525 68.384,49.4 V1.19
NetR20_1: CMD2.1 R20.1 V1.21 | length 43.4
  Top Layer w0.5: v1(68.4,51.4) R20.1 68.55,54.9 72.45,51 V1.21 ; CMD2.1@68.5,28 CMD2.1
  Bottom Layer w0.5: v1(68.4,51.4) 68.4,28.1 CMD2.1
NetR21_1: R21.1 V1.22 | length 4.1
  Top Layer w0.5: R21.1 80.55,54.4 82.5,52.45 82.5,51.8 V1.22
NetR22_1: CMD5.1 R22.1 V1.18 | length 39.9
  Top Layer w0.5: CMD5.1@56,28 55.65,28.35 R22.1 62.225,34.6 76.225,48.6 V1.18
out_osc: "CLK CPLD.1" V1.44 Y1.5 | length 12.1
  Top Layer w0.5: 92.9,38.5 93.9,39.5 93.9,41.9 ; V1.44 94.9,43.8 94.94,43.84 95.96,43.84 95.9,43.78 95.9,42.893 95.607,42.6 94.193,42.6 93.9,42.307 93.9,41.9 ; Y1.5 93.94,41.86 93.9,41.9
SourceM3: B1.2 M3.5 M3.6 M3.7 M3.8 M4.5 M4.6 M4.7 M4.8 | length 40.1
  Top Layer w0.5: B1.2 B1.2@33.74,84.16 ; 42.795,74.305 43,74.1 43.306,74.406 ; 42.795,84.16 43.251,84.16 43.306,84.105 43.306,82.835 43.306,81.565 M3.5@43.306,80.295 ; 55,74.1 57.24,71.86 M4.6
  Top Layer w4: B1.2@33.74,84.16 41,84.16 ; 40.5,74.5 40.5,84.355
  Top Layer w7: 43,74.1 55,74.1
pads on no net: D1.2 D2.2 D3.2 V1.1 V1.2 V1.3 V1.5 V1.6 V1.7 V1.8 V1.12 V1.13 V1.14 V1.16 V1.23 V1.27 V1.28 V1.29 V1.30 V1.31 V1.32 V1.33 V1.34 V1.36

## Polygon pours and split planes (outlines as drawn)
GND on Top Layer "GND_L01_P016" (solid, pour order 16): 24.8,126.8 24.8,25.9 26.3,24.4 134,24.4 134,126.2
NetB2_1 on Top Layer "NETB2_1_L01_P004" (solid, pour order 4): 133.4,126.7 133.3,126.8 118.7,126.8 118.7,114.3 115.8,111.4 102.5,111.4 102.5,101.9 105.2,99.2 105.2,98 116.4,98 119.1,100.7 133.8,100.7
+5 on Top Layer "+5_L01_P010" (solid, pour order 10): 96.981,41.96 103.841,35.1 111.3,35.1 111.3,30.5 110.8,30 100.3,30 100.3,27.2 99.1,26 98.6,26.5 96.7,26.5 96.7,31.6 94.8,33.5 94.8,41.8 94.9,41.9
NetC5_1 on Top Layer "NETC5_1_L01_P002" (solid, pour order 2): 62.8,117.9 62.2,117.3 62.2,92.4 80.2,92.4 83.3,95.5 86.9,95.5 87.4,96 87.4,103.6 82.062,103.6 79.002,106.66 80.3,107.958 80.3,117.7
NetD1_3 on Top Layer "Top Layer-NetD1_3" (solid, pour order 21): 84.4,92.3 84.07,92.63 80.77,92.63 79.54,91.4 77.9,91.4 77.9,84.3 77.4,83.8 77.541,83.659 83.64,83.659 83.64,89.097 84.8,90.257 84.8,92.365
NetD1_3 on Top Layer "Top Layer-NetD1_3 1" (solid, pour order 19): 84.9,83.5 84.5,83.9 84.5,92.8 79.9,92.8 76.7,89.6 76.6,89.6 76.6,83.7 76.5,83.6
NetD1_3 on Top Layer "Top Layer-No Net" (solid, pour order 18): 84.535,92.63 84.8,92.365 84.8,82.4 77.8,82.4 77.2,83 77.2,92.6
+3V3 on Top Layer "+3V3_L01_P014" (solid, pour order 14): 126.227,90.273 126.1,90.4 126.1,93.1 106.1,93.1 105.9,92.9 106,92.8 106,90.8 114.2,90.8 114.5,90.5 113.9,89.9 113.9,86.8 106.1,86.8 105.5,86.2 105.7,86 105.7,85.1 125.9,85.1 126.2,84.8
NetM4_1 on Top Layer "NETM4_1_L01_P009" (solid, pour order 9): 64.87,71.965 64.8,72.035 64.8,78.9 80.8,78.9 81,78.7 80.83,78.53 80.83,71.965
DoubleNMOS on Top Layer "DOUBLENMOS_L01_P008" (solid, pour order 8): 48.77,81.565 49,81.795 49,87.8 56.3,87.8 58.6,85.5 58.6,82.06 58.9,81.76 58.705,81.565
SourceM3 on Top Layer "SOURCEM3_L01_P007" (solid, pour order 7): 32,83.7 42.6,73.1 42.6,70.2 61.5,70.2 61.9,70.6 61.9,77.7 44.7,77.7 44.5,77.9 46,79.4 46,86.2 33.4,86.2 33.3,86.3
NetB1_1 on Top Layer "NETB1_1_L01_P006" (solid, pour order 6): 57.6,94.2 57.7,94.3 57.7,101.3 26.7,101.3 26.7,88.3 50.3,88.3 57.4,95.4
NetC6_1 on Top Layer "NETC6_1_L01_P005" (solid, pour order 5): 101.1,97.3 101.1,103 100.5,102.4 88.8,102.4 88.8,81.3 87.1,79.6 83.1,79.6 83.1,71.2 82.8,70.9 87.9,65.8 96.1,65.8 97.4,67.1 97.4,93.7
NetD2_3 on Top Layer "NETD2_3_L01_P003" (solid, pour order 3): 84.267,106.965 93.23,106.965 93.6,107.335 93.6,119.2 84.4,119.2
NetD3_3 on Top Layer "NETD3_3_L01_P001" (solid, pour order 1): 49.5,117.3 49.57,117.23 49.57,108.965 60.83,108.965 61.03,109.165 60.9,109.295 60.9,117.3
NetCON5_1 on Top Layer "NETCON5_1_L01_P000" (solid, pour order 0): 45.8,109.4 45.2,110 45.2,119.1 27.5,119.1 27,118.6 27,107.4 45.1,107.4 45.1,111.56 44.945,111.715
GND on Bottom Layer "GND_L02_P015" (solid, pour order 15): 25.7,126.8 25.1,126.2 25.1,24.7 134.6,24.7 134.3,25 134.3,126.5
+5 on Bottom Layer "+5_L02_P012" (solid, pour order 12): 111.2,57.2 112.5,58.5 112,59 76.3,59 76.3,24.6 76.4,24.5 76.8,24.9 111.2,24.9

## Silkscreen, mask and mechanical layers (free items; w line width, h text height)
Top Overlay:
  drawing of 5 lines, arcs and shapes, not listed
  text "-" at 41.8,122.6 h1.52
  text "+" at 42,115.8 h1.52
  text "+" at 100.4,110.4 h1.52
  text "-" at 105.6,110.3 h1.52
  text "+" at 121.4,110.3 h1.52
  text "-" at 115.1,110.1 h1.52
  text "+" at 41.2,88.5 h1.52
  text "3V3" at 124.6,85.4 h1.52
  text "-" at 41.1,84.4 h1.52
  text "GND" at 129.7,82.6 h1.52
  text "GEI Corp" at 98.7,72.7 h5
  text "Team 1" at 100.8,69.7 h5
  text "GND" at 129.9,67.2 h1.52
  text "BMS" at 103.1,65.4 h5
  text "1" at 124.9,44.3 h1.52
  text "GND" at 129.9,44.3 h1.52
  text "GND" at 118.6,32.4 h1.52
  text "6" at 97.9,24.6 h1.52
  text "1" at 85.2,24.5 h1.52